# Altium PCB PCB1.PcbDoc
Units mil, origin at the board's own origin, x right, y up, seen from the top; angles counter-clockwise.
Board outline 6000 x 4000 mil, 2 copper layers (Top Layer, Bottom Layer); 7 components, 5 nets, 18 pads, 0 vias.
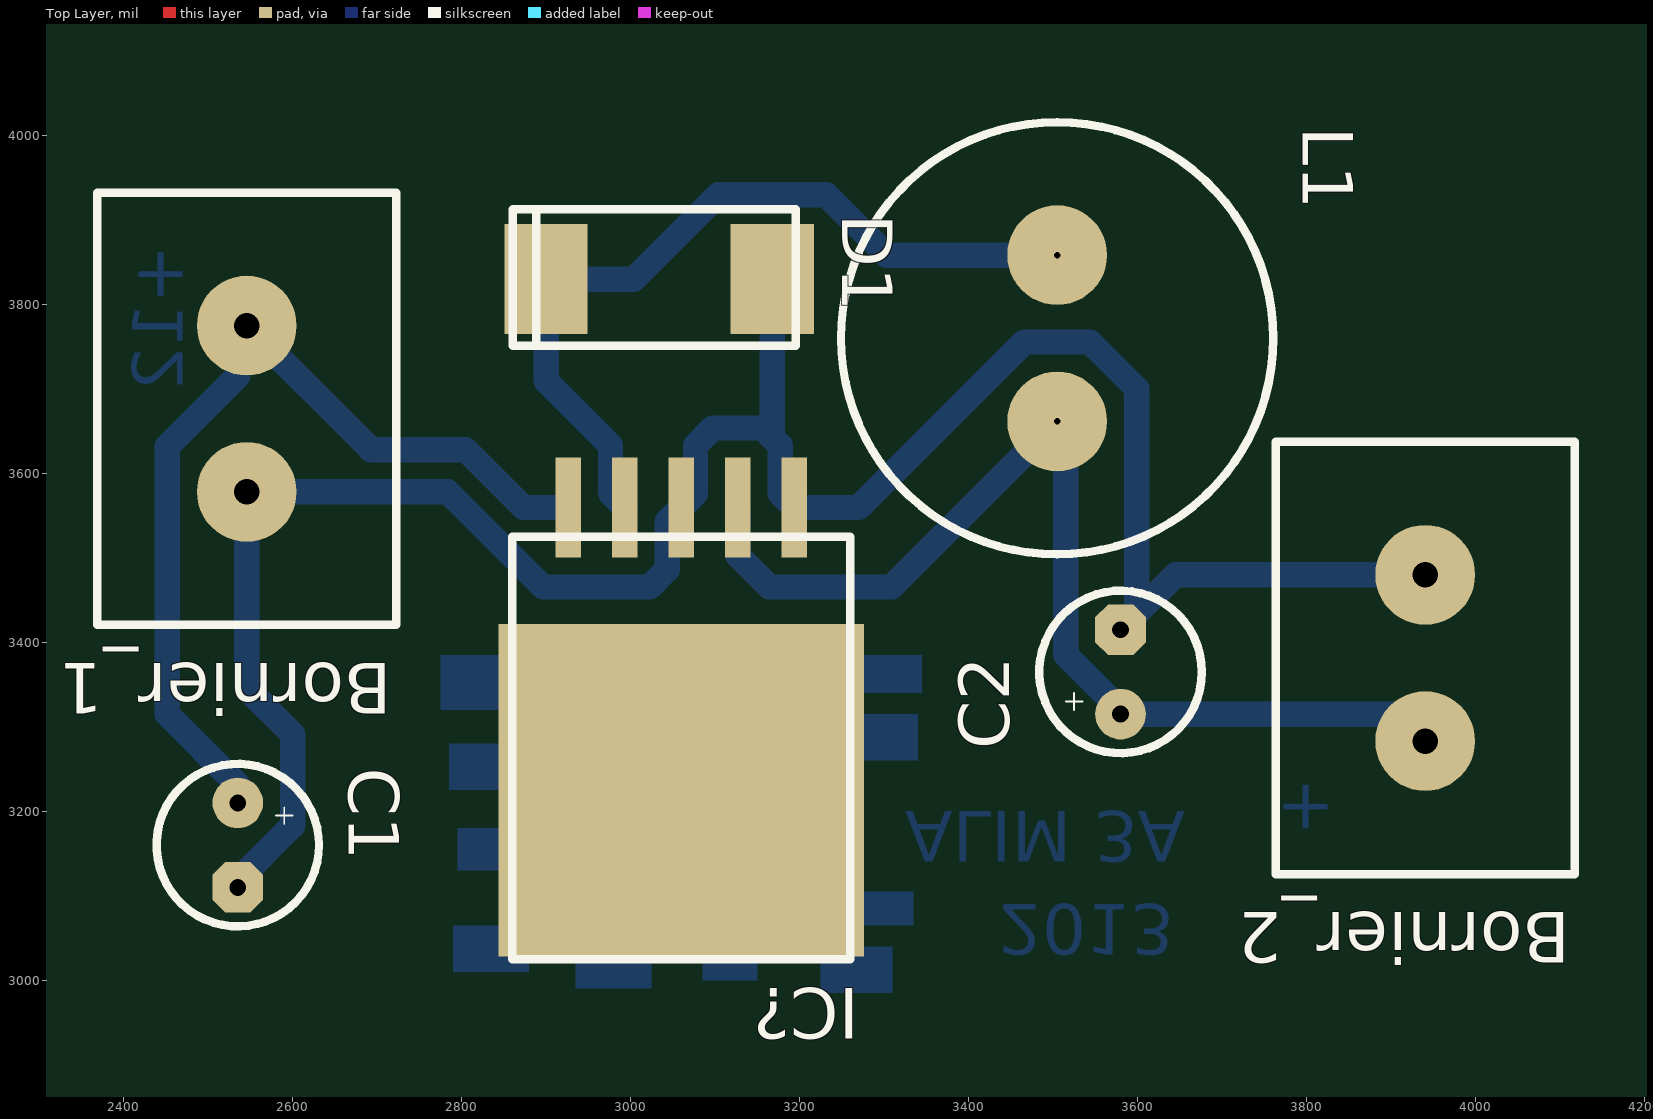
[diagram p0: Top Layer view]
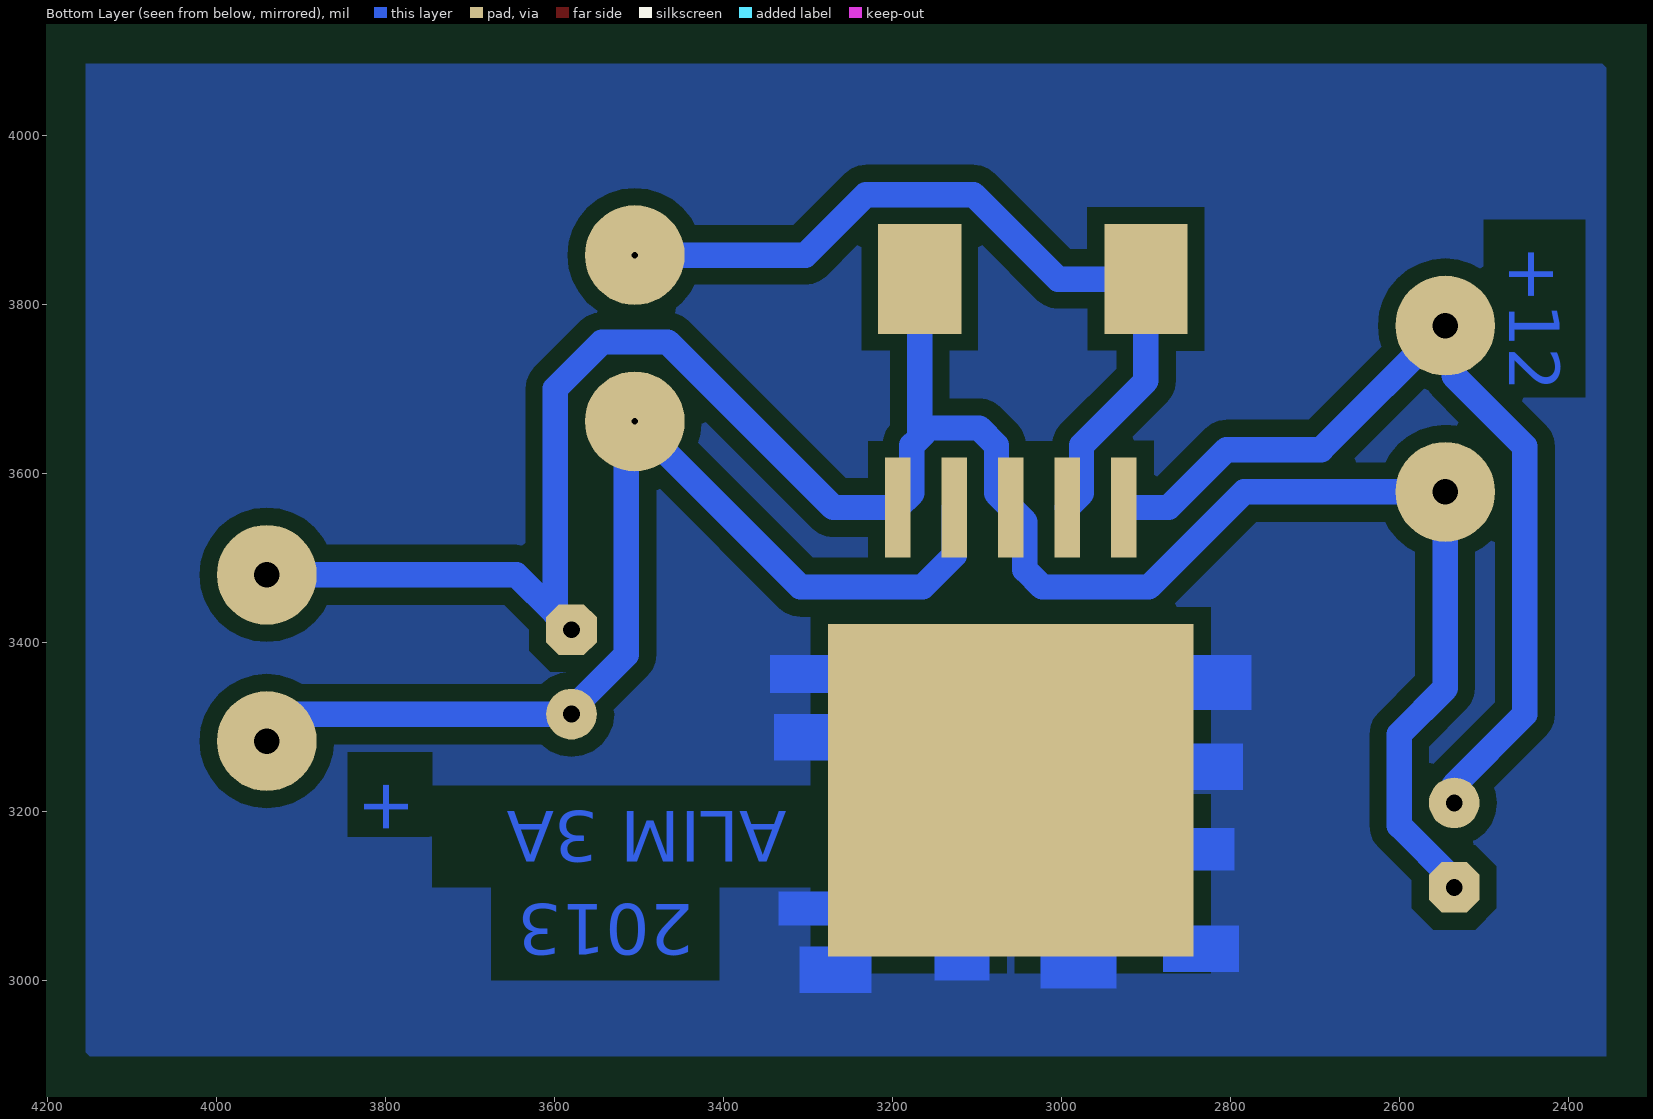
[diagram p1: Bottom Layer view, seen from below]

## Layer stack, top to bottom
Top Layer: signal copper 1.4
Dielectric: dielectric 12.6, FR-4, Dk 4.8
Bottom Layer: signal copper 1.4

## Board outline
1000,1000 7000,1000 7000,5000 1000,5000

## Design rules (kind name [scope] priority, off if disabled: settings)
Clearance [All] p1: gap=20
PolygonConnect [All] p1: connectstyle=Relief reliefconductorwidth=10 reliefentries=4 polygonreliefangle="90 Angle"
RoutingVias [All] p1: holewidth=28 width=50 viastyle="Through Hole" minholewidth=28 minwidth=50 maxholewidth=28 maxwidth=50
SilkscreenOverComponentPads [All] p1: minsilkscreentomaskgap=10
SolderMaskExpansion [All] p1: expansion=4
Width [All] p1: maxlimit=30 minlimit=30 preferedwidth=30
27 further rules are at their usual default settings.

## Components (designator, comment, footprint, x,y, rotation, side; value= is the part's Value field where it differs from the comment)
Bornier_1 "Bornier" Bornier 2585,3775 r270 top
Bornier_2 "Bornier" Bornier 3980,3480 r270 top
C1 "470uF" Capa_pol1 2535,3215 r270 top
C2 "470uF" Capa_pol1 3580,3310 r90 top
D1 "Schottky B340" SMC 2900,3830 r0 top
IC? "TS2596" TO263-5L 3060,3225 r180 top
L1 "Inductance" self 3505,3760 r270 top

## Footprints (in the part's own frame and the unit in brackets; to place one, negate y for a bottom-side part, rotate by r counter-clockwise, add the part's x,y. Pads: shape width x height; smd on the part's side, far side on the other; paste and mask are expansions set on the pad)
Bornier [mm]
  round 3 hole 0.762: 1(0,-1) 2(5,-1)
  silkscreen extent -4,-5.5 9,3.5
Capa_pol1 [mil]
  round 60 hole 20: 1(5,0)
  oct 60x60 hole 20: 2(105,0)
  silkscreen extent -41,-96 151,96
self [mm]
  round 3 hole 0.2: 1(-2.5,0) 2(2.5,0)
  silkscreen extent -6.5,-6.5 6.5,6.5
SMC [mm]
  rect 2.5x3.3 all layers, no hole: 1(6.8,0) 2(0,0)
  silkscreen extent -1,-2 7.5,2.1
TO263-5L [mm]
  rect 11x10 all layers, no hole: 0(0,0)
  rect 0.77x3 all layers, no hole: 1(3.4,-8.5) 2(1.7,-8.5) 3(0,-8.5) 4(-1.7,-8.5) 5(-3.4,-8.5)
  silkscreen extent -5.08,-7.62 5.08,5.08

## Part data
Bornier_1 Bornier_2: library part Bornier2
C1 C2: library part "Capa Pol"

## Nets (pads, with @x,y where several pads share a name; then routed paths per layer and width w, separated by ;. In a path a pad name is that pad's centre, name@x,y a point inside that pad or via, vN(x,y) a via of type N, cw(c..) or ccw(c..) an arc to the next point about the centre after c; other vN are vias at no path point)
HEATSINK: IC?.0
NetBornier_1_1: Bornier_1.1 C1.1 IC?.1 | length 1108.2
  Bottom Layer w30: C1.1 2535,3231.21 2451.57,3314.64 2451.57,3632.13 2535,3715.55 2535,3764.37 Bornier_1.1 2692.48,3628.15 2804.64,3628.15 2873.14,3559.65 IC?.1
NetBornier_1_2: Bornier_1.2 Bornier_2.1 C1.2 C2.2 D1.1 IC?.3 IC?.5 | length 2779.8
  Bottom Layer w30: C1.2 2535,3118.08 2600,3183.08 2600,3291.29 2545.63,3345.66 Bornier_1.2 2783.93,3578.15 2896.49,3465.59 3022.73,3465.59 3043.23,3486.09 3043.23,3542.87 IC?.3 3076.77,3576.42 3076.77,3633.2 3097.27,3653.7 3156.58,3653.7 3167.72,3642.57 ; D1.1 3167.72,3642.57 ; C2.2 C2.2@3599.06,3434.06 ; Bornier_2.1 3645,3480 C2.2@3599.06,3434.06 ; 3167.72,3642.57 3177.09,3633.2 3177.09,3576.42 IC?.5 3270.06,3559.65 3466.04,3755.63 3543.96,3755.63 3599.06,3700.53 C2.2@3599.06,3434.06
NetBornier_2_2: Bornier_2.2 C2.1 IC?.4 L1.2 | length 1282.9
  Bottom Layer w30: IC?.4 3126.93,3502.86 3164.2,3465.59 3309.02,3465.59 L1.2 3515,3651.57 3515,3385.5 3580,3320.5 C2.1 3908.78,3315 Bornier_2.2
NetD1_2: D1.2 IC?.2 L1.1 | length 984.9
  Bottom Layer w30: IC?.2 2976.3,3576.42 2976.3,3633.2 2900,3709.5 D1.2 3004.05,3830 3104.01,3929.96 3231.43,3929.96 3302.96,3858.43 L1.1

## Polygon pours and split planes (outlines as drawn)
HEATSINK on Bottom Layer "Top Layer-No Net" (solid, pour order 3): 2355,4080 2360,4085 4155,4085 4155,2915 4150,2910 2355,2910

## Other copper
Bottom Layer:
  rectangle net HEATSINK: 3265,3065 3335,3105
  rectangle net HEATSINK: 3255,3340 3345,3385
  rectangle net HEATSINK: 3255,3260 3340,3315
  rectangle net HEATSINK: 3225,2985 3310,3040
  rectangle net HEATSINK: 3085,3000 3150,3040
  rectangle net HEATSINK: 2935,2990 3025,3050
  rectangle net HEATSINK: 2790,3010 2880,3065
  rectangle net HEATSINK: 2795,3130 2875,3180
  rectangle net HEATSINK: 2785,3225 2890,3280
  rectangle net HEATSINK: 2775,3320 2890,3385
  text "+12" at 2470,3870 h60 r90
  text "+" at 3825,3240 h60 r90
  text "ALIM 3A" at 3325,3200 h60 r180
  text "2013" at 3435,3090 h60 r180